# Altium PCB PCB1.PcbDoc
Units mil, origin at the board's own origin, x right, y up, seen from the top; angles counter-clockwise.
Board outline 1009.87 x 1502 mil, 2 copper layers (Top Layer, Bottom Layer); 15 components, 14 nets, 60 pads, 14 vias.
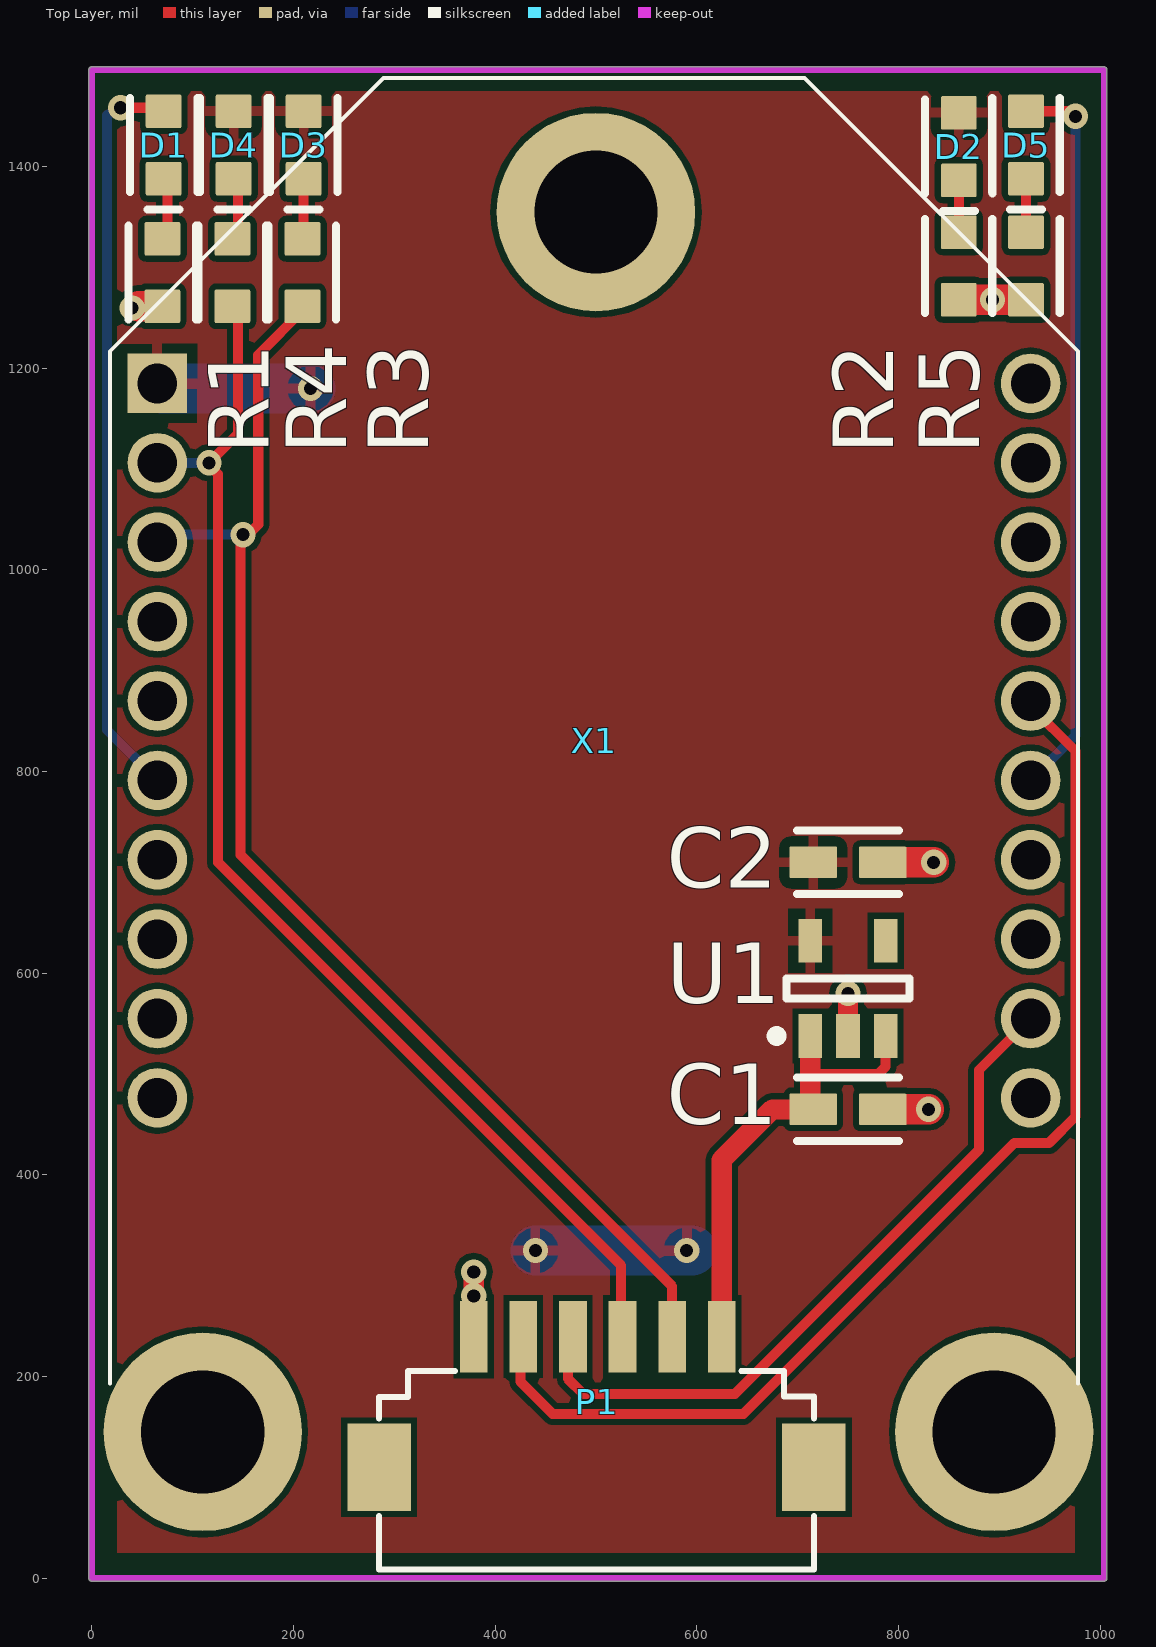
[diagram p0: Top Layer view]
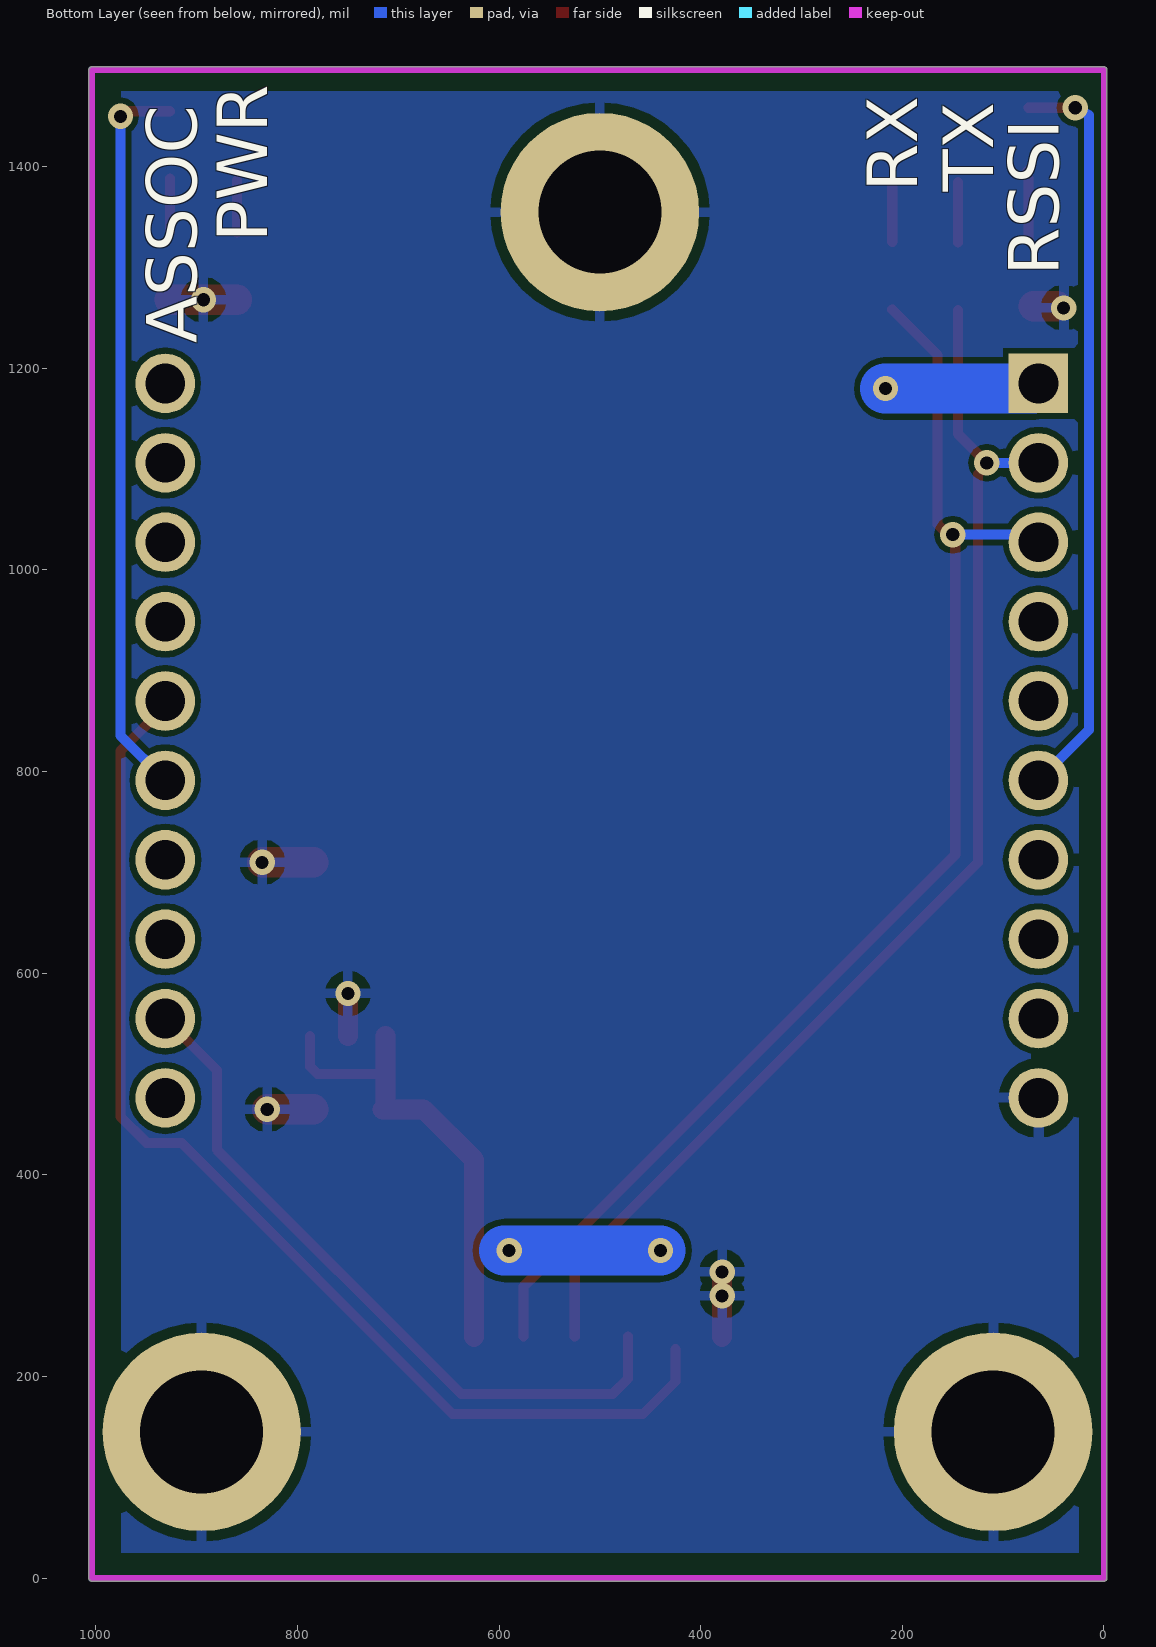
[diagram p1: Bottom Layer view, seen from below]
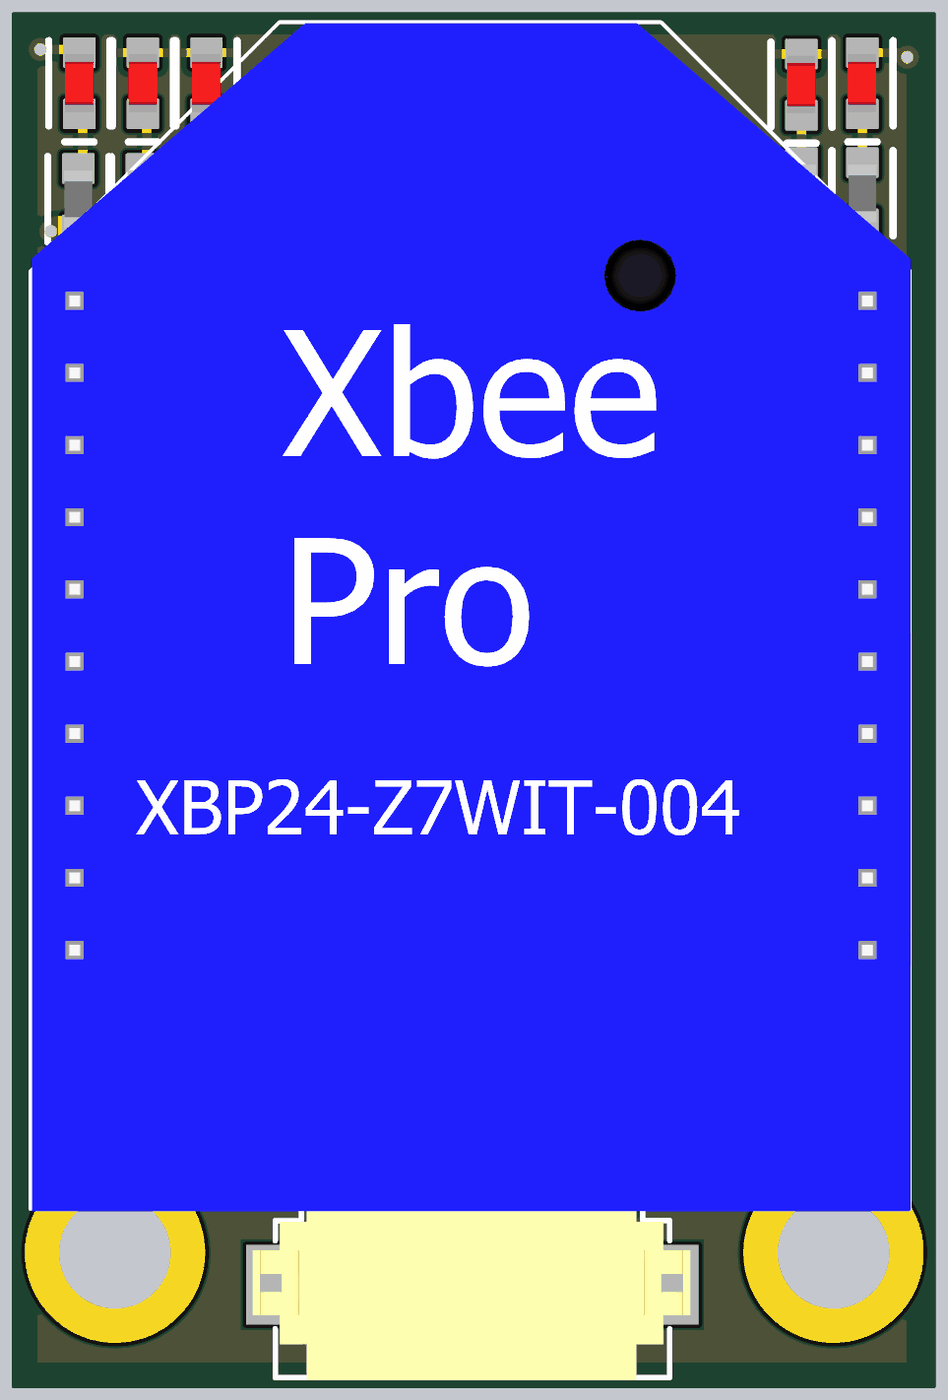
[diagram p2: 3D render of the assembled board from above, using the file's embedded part models]

## Layer stack, top to bottom
Top Solder: solder mask 0.4, Solder Resist, Dk 3.5
Top Layer: signal copper 1.4
Dielectric 1: dielectric 12.6, FR-4, Dk 4.8
Bottom Layer: signal copper 1.4
Bottom Solder: solder mask 0.4, Solder Resist, Dk 3.5

## Board outline
0,-2.97 cw(c0,0) -2.97,0 -2.97,1496.06 cw(c0,1496.06) 0,1499.03 1003.94,1499.03 cw(c1003.94,1496.06) 1006.9,1496.06 cw(c1003.94,1496.06) 1006.86,1495.53 cw(c1003.94,1495) 1006.9,1495 1006.9,0 cw(c1003.94,0) 1003.94,-2.97

## Design rules (kind name [scope] priority, off if disabled: settings)
Clearance [All] p1: gap=6
Height [All] p1: minheight=0 maxheight=99999 prefheight=500
HoleSize [All] p1: absolutevalues=TRUE maxlimit=500 minlimit=13 maxpercent=80.000 minpercent=20.000
MinimumAnnularRing [All] p1: minimumring=6
PolygonConnect [All] p1: connectstyle=Relief reliefconductorwidth=10 reliefentries=4 polygonreliefangle="90 Angle" airgapwidth=10
RoutingVias [All] p1: holewidth=13 width=25 viastyle="Through Hole" minholewidth=13 minwidth=25 maxholewidth=28 maxwidth=500
SilkToSilkClearance [All] p1: silktosilkclearance=6
SolderMaskExpansion [All] p1: expansion=4
Width [All] p1: maxlimit=500 minlimit=6 preferedwidth=10
27 further rules are at their usual default settings.

## Components (designator, comment, footprint, x,y, rotation, side; value= is the part's Value field where it differs from the comment)
C1 "GCM188R71C105KA64D" CAPC1608 750,465 r180 top
C2 "GCM188R71C105KA64D" CAPC1608 750,710 r180 top
D1 "LTST-C191KGKT" LEDC1608M_AK 71.13,1421.51 r270 top
D2 "LTST-C191KGKT" LEDC1608M_AK 860,1420 r270 top
D3 "LTST-C191KGKT" LEDC1608M_AK 210,1421.51 r270 top
D4 "LTST-C191KGKT" LEDC1608M_AK 140.56,1421.51 r270 top
D5 "LTST-C191KGKT" LEDC1608M_AK 926.58,1421.51 r270 top
P1 "Header 6H" DF13A-6P-1.25H 285,110 r0 top
R1 "CR0603-FX-1001ELF" RESC1608 70,1295 r90 top
R2 "CR0603-FX-1001ELF" RESC1608 860,1301.51 r90 top
R3 "CR0603-FX-1001ELF" RESC1608 208.87,1295 r90 top
R4 "CR0603-FX-1001ELF" RESC1608 139.44,1295 r90 top
R5 "CR0603-FX-1001ELF" RESC1608 926.58,1301.51 r90 top
U1 "V62/06626-05XE" TI-DBV5_N 750,585 r90 top
X1 "XBEE" XBEE_PRO_ANT 65,1185 r270 top

## Footprints (in the part's own frame and the unit in brackets; to place one, negate y for a bottom-side part, rotate by r counter-clockwise, add the part's x,y. Pads: shape width x height; smd on the part's side, far side on the other; paste and mask are expansions set on the pad)
CAPC1608 [mm] "Chip Capacitor, Non Polarised 1.6mm x 0.8mm x ?mm (0603)"
  rrect10% 1.2x0.8 smd: 1(-0.875,0) 2(0.875,0)
  silkscreen extent -1.28,-0.8 1.28,0.8, body extent -0.8,-0.43 0.8,0.39, height 0.86
DF13A-6P-1.25H [mm]
  rect 1.6x2.2 / inner rect 0x0 / far side rect 0x0 all layers, no hole: 0(0,0) 0(10.95,0)
  rect 0.7x1.8 smd: 1(8.631,3.289) 2(7.381,3.289) 3(6.131,3.289) 4(4.881,3.289) 5(3.631,3.289) 6(2.381,3.289)
  silkscreen extent 0,-2.58 10.95,2.42, body extent -0.63,-2.65 11.53,3.85, height 3.58
LEDC1608M_AK [mm] "LED, Chip, 0603"
  rrect10% 0.85x0.9 smd: A(-0.85,0) K(0.85,0)
  silkscreen extent -1.18,-0.85 1.62,0.85, body extent -0.8,-0.4 0.8,0.39, height 1.09
RESC1608 [mm] "Chip Resistor, 1.6mm x 0.8mm x ?mm (0603)"
  rrect10% 0.85x0.9 smd: 1(-0.85,0) 2(0.85,0)
  silkscreen extent -1.18,-0.85 1.18,0.85, body extent -0.8,-0.4 0.8,0.4, height 0.4
TI-DBV5_N [mm] "SOT23, 5-Leads, Body 2.9x1.6mm, Pitch 0.95mm, IPC Medium Density"
  rect 1.1x0.6 smd: 1(-1.2,0.95) 2(-1.2,0) 3(-1.2,-0.95) 4(1.2,-0.95) 5(1.2,0.95)
  silkscreen extent -1.32,-1.55 0.25,1.92, body extent -0.87,-1.52 0.87,1.53, height 1.45
XBEE_PRO_ANT [mm]
  rect 1.5x1.5 hole 1: 1(0,0)
  round 1.5 hole 1: 2(2,0) 3(4,0) 4(6,0) 5(8,0) 6(10,0) 7(12,0) 8(14,0) 9(16,0) 10(18,0) 11(18,22) 12(16,22) 13(14,22) 14(12,22) 15(10,22) 16(8,22) 17(6,22) 18(4,22) 19(2,22) 20(0,22)
  silkscreen extent -7.7,-1.2 25.2,23.2, body extent -7.68,-1.16 25.26,23.22, height 33.99

## Part data
C1 C2: "Multilayer Ceramic Capacitors MLCC - SMD/SMT 0603 1.0uF 16volts X7R 10%"
D1 D2 D3 D4 D5: "LED GREEN CLEAR 0603 SMD"
P1: "Header, 6-Pin, Right Angle"
R1 R2 R3 R4 R5: "RES SMD 1K OHM 1% 1/10W 0603"
U1: "Single Output LDO, 400 mA, Fixed 3 V Output, 1.7 to 5.5 V Input, with Reverse Current Protection, 5-pin SOT-23 (DBV), -55 to 125 degC, Green (RoHS & no Sb/Br)"

## Free pads (board coordinates)
  round 196.85 hole 122.05: 1(110,145) 1(500,1355) 1(895,145)

## Via types
v1: diameter 25, hole 13, Top Layer to Bottom Layer, tented both sides, 14 vias

## Nets (pads, with @x,y where several pads share a name; then routed paths per layer and width w, separated by ;. In a path a pad name is that pad's centre, name@x,y a point inside that pad or via, vN(x,y) a via of type N, cw(c..) or ccw(c..) an arc to the next point about the centre after c; other vN are vias at no path point)
5V: C1.2 P1.1 U1.1 U1.3 | length 469.1
  Top Layer w10: 712.6,500 780,500 787.4,507.4 U1.3
  Top Layer w20: P1.1 624.8,414.8 675,465 C1.2 712.6,467.95 712.6,500 U1.1
ASSOC: D5.A X1.15 | length 728.3
  Top Layer w10: D5.A 970.69,1454.98 v1(975.67,1450)
  Bottom Layer w10: X1.15 975.67,835.83 v1(975.67,1450)
CTS: P1.4 X1.12 | length 707.3
  Top Layer w10: P1.4@472.17,239.49 472.17,197.83 487.17,182.83 637.83,182.83 880,425 880,503.94 X1.12
GND: C1.1 C2.1 P1.6 pad.1 R1.1 R2.1 R5.1 U1.2 X1.10 | length 294.8
  Top Layer w10: v1@45,1260 v1@46.54,1261.54
  Top Layer w20: P1.6 v1(378.74,303.74) ; U1.2 v1(750,580)
  Top Layer w30: v1@46.54,1261.54 R1.1 ; C1.1 v1(830,465) ; C2.1 v1(835,710) ; R2.1 R5.1
  other v1: 378.74,280 40,1260 893.29,1268.05
NetD1_K: D1.K R1.2 | length 61.7
  Top Layer w10: R1.2@75,1328.46 D1.K@75,1388.04 ; D1.K@75,1396.54 D1.K@76.54,1395
NetD2_K: D2.K R2.2 | length 51.6
  Top Layer w10: R2.2 D2.K
NetD3_K: D3.K R3.2 | length 59.6
  Top Layer w10: R3.2@210,1325.21 D3.K@210,1384.79
NetD4_K: D4.K R4.2 | length 59.6
  Top Layer w10: R4.2@145,1325 D4.K@145,1384.57
NetD5_K: D5.K R5.2 | length 53.1
  Top Layer w10: R5.2 D5.K
RSSI: D1.A X1.6 | length 742.6
  Top Layer w10: v1(28.46,1458.46) D1.A@75,1458.46
  Bottom Layer w10: v1(28.46,1458.46) 15,1451.4 15,841.3 X1.6
RTS: P1.5 X1.16 | length 1149.2
  Top Layer w10: P1.5@425,227.44 425,195 457.17,162.83 646.12,162.83 915.1,431.81 949.59,431.81 975.67,457.89 975.67,820.41 931.14,864.94 X1.16
RX: P1.2 R3.1 X1.3 | length 1310.1
  Top Layer w10: R3.1@210,1258.28 165,1213.28 165,1045 147.5,1027.5 147.5,717.5 575.59,289.41 P1.2
  Bottom Layer w10: X1.3 72.52,1035 v1(150,1035)
TX: P1.3 R4.1 X1.2 | length 1254.6
  Top Layer w10: R4.1@145,1258.07 145,1135 v1(116.26,1106.26) 113.74,1106.26 125,1095 125,710 525,310 P1.3@525,239.49
  Bottom Layer w10: X1.2 v1(116.26,1106.26)
VCC: C2.2 D2.A D3.A D4.A U1.5 X1.1 | length 308.9
  Bottom Layer w50: X1.1 70,1180 v1(216.85,1180) ; v1(440,325) v1@595,325
  other v1: 590,325
pads on no net: P1.0 U1.4 X1.4 X1.5 X1.7 X1.8 X1.9 X1.11 X1.13 X1.14 X1.17 X1.18 X1.19 X1.20

## Polygon pours and split planes (outlines as drawn)
GND on Bottom Layer "GND" (solid, remove dead copper, pour order 2): 25,1475 25,25 975,25 975,1475
VCC on Top Layer "VCC" (solid, remove dead copper, pour order 4): 25,1475 25,25 975,25 975,1475 25,1475

## Keep-outs
Keep-Out Layer:
  lines w5.91: 1003.94,1495 1003.94,0 0,0 0,1496.06 1003.94,1496.06

## Silkscreen, mask and mechanical layers (free items; w line width, h text height)
Bottom Overlay:
  text "TX" at 110,1374.95 h50 r270
  text "RX" at 185,1374.95 h50 r270
  text "PWR" at 830,1324.97 h50 r270
  text "RSSI" at 45,1291.65 h50 r270
  text "ASSOC" at 900,1225 h50 r270